# Altium PCB GoodProject_V1.0.PcbDoc (part 1 of 2)
Units mil, origin at the board's own origin, x right, y up, seen from the top; angles counter-clockwise.
Board outline 2680 x 2680 mil, 2 copper layers (Top Layer, Bottom Layer); 78 components, 77 nets, 313 pads, 117 vias.
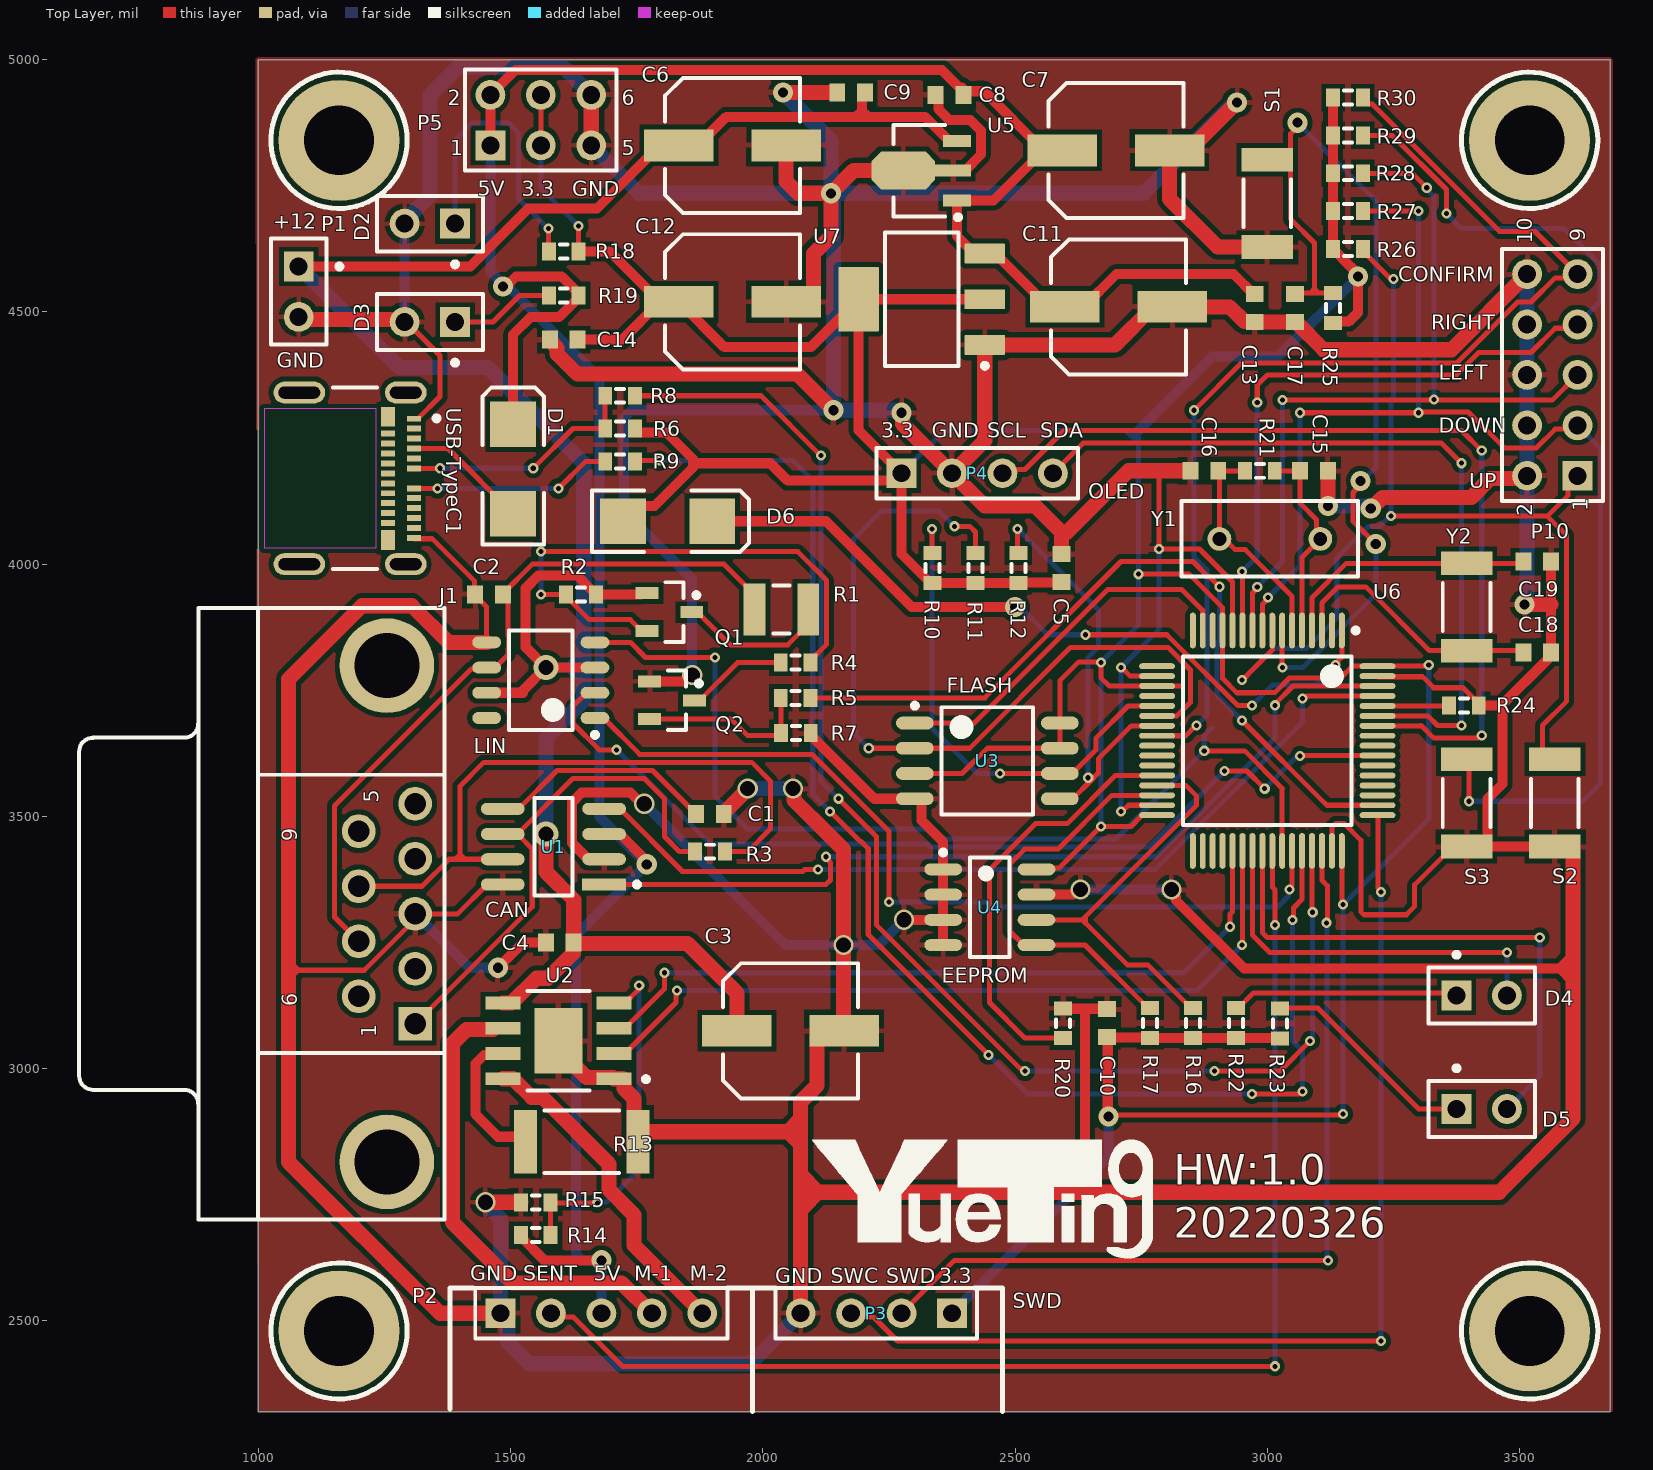
[diagram p0: Top Layer view]
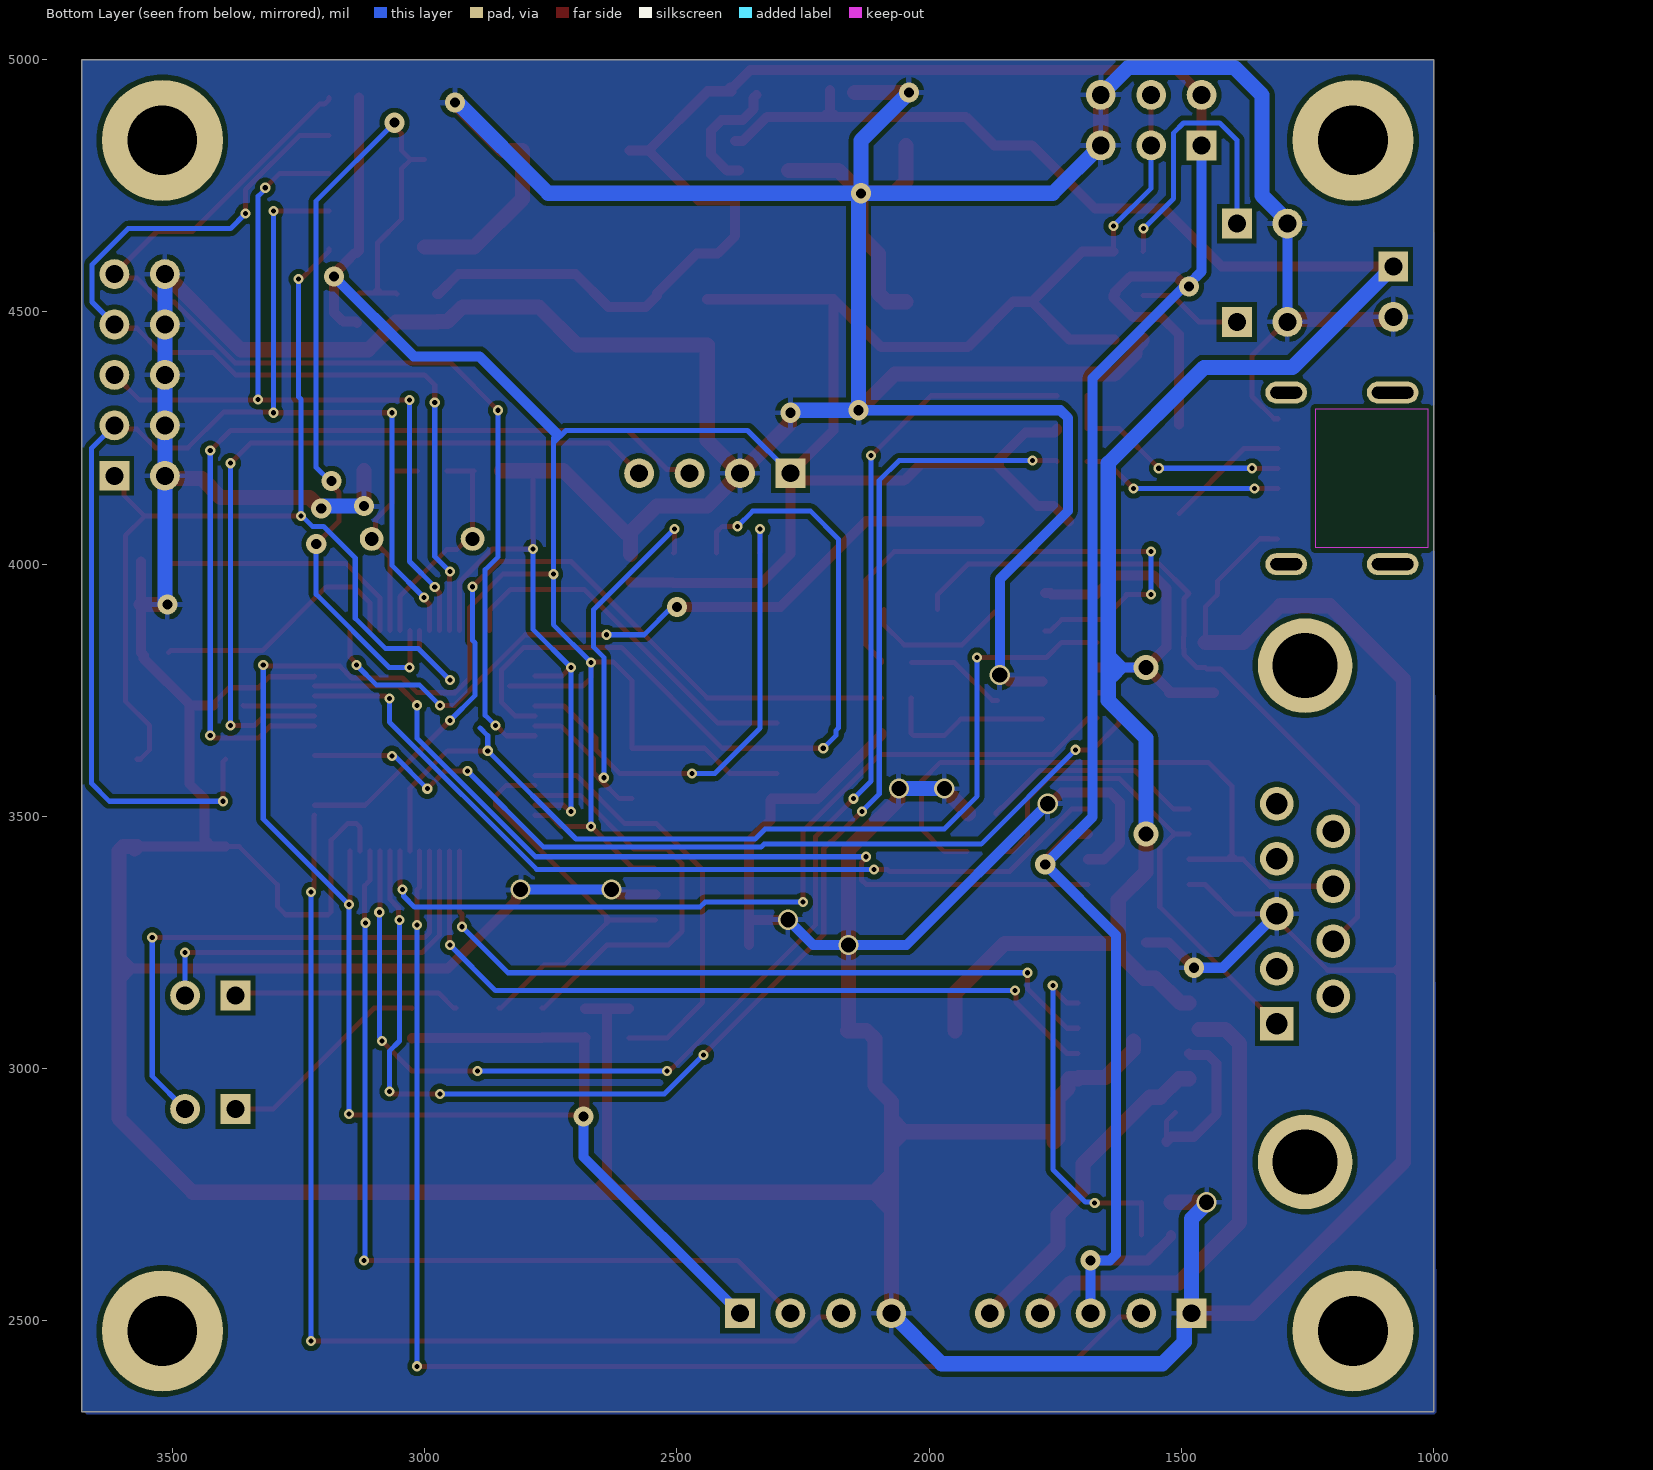
[diagram p1: Bottom Layer view, seen from below]

## Layer stack, top to bottom
Top Solder: solder mask 0.4, Solder Resist, Dk 3.5
Top Layer: signal copper 1.4
Dielectric 1: dielectric 12.6, FR-4, Dk 4.8
Bottom Layer: signal copper 1.4
Bottom Solder: solder mask 0.4, Solder Resist, Dk 3.5

## Board outline
1000,2320 3680,2320 3680,5000 1000,5000

## Design rules (kind name [scope] priority, off if disabled: settings)
Clearance [All] p1: gap=10 ignorepadtopadclearanceinfootprint=FALSE except(0: Arc-Hole Track-Hole SMDPad-Hole THPad-Hole Via-Hole Fill-Hole Poly-Hole Region-Hole Text-Hole; 6: Arc-Arc Arc-Track Track-Track)
PolygonConnect [All] p1: connectstyle=Relief reliefconductorwidth=10 reliefentries=4 polygonreliefangle="90 Angle" airgapwidth=10
RoutingVias [All] p1: holewidth=10 width=20 viastyle="Through Hole" minholewidth=10 minwidth=20 maxholewidth=30 maxwidth=50
SolderMaskExpansion [All] p1: expansion=4 istentingtop=FALSE
Width [All] p1: maxlimit=50 minlimit=10 preferedwidth=10
30 further rules are at their usual default settings.

## Components (designator, comment, footprint, x,y, rotation, side; value= is the part's Value field where it differs from the comment)
C1 "Cap" 1608[0603] 1895,3505 r0 top value=0.1uF
C2 "Cap" 1608[0603] 1457.44,3940 r0 top value=0.1uF
C3 "100uF" NIC-CAPA2-6.3X5.8_V 2055,3075 r0 top
C4 "Cap" 1608[0603] 1597.56,3250 r0 top value=0.22uF
C5 "Cap" 1608[0603] 2591.83,3992.13 r90 top value=0.1uF
C6 "100uF" NIC-CAPA2-6.3X5.8_V 1940,4830 r0 top
C7 "100uF" NIC-CAPA2-6.3X5.8_V 2700,4820 r0 top
C8 "Cap" 1608[0603] 2370,4930 r0 top value=22uF
C9 "Cap" 1608[0603] 2175,4935 r0 top value=22uF
C10 "Cap" 1608[0603] 2682.56,3090.32 r270 top value=22pF
C11 "22uF" NIC-CAPA2-6.3X5.8_V 2705,4510 r0 top
C12 "22uF" NIC-CAPA2-6.3X5.8_V 1940,4520 r0 top
C13 "Cap" 1608[0603] 2975,4507.56 r90 top value=0.1uF
C14 "Cap" 1608[0603] 1605.47,4445 r0 top value=0.1uF
C15 "Cap" 1608[0603] 3092.56,4185 r0 top value=22pF
C16 "Cap" 1608[0603] 2875.12,4185 r180 top value=22pF
C17 "Cap" 1608[0603] 3055,4507.56 r90 top value=0.1uF
C18 "Cap" 1608[0603] 3535,3825 r180 top value=22pF
C19 "Cap" 1608[0603] 3535,4005 r180 top value=22pF
D1 "Diode" SMB 1505,4188.58 r90 top
D2 "LED2" PIN2 1390,4675 r180 top
D3 "LED2" PIN2 1390,4480 r180 top
D4 "LED2" PIN2 3375,3145 r0 top
D5 "LED2" PIN2 3375,2920 r0 top
D6 "Diode 1N4148" SMB 1811.42,4085 r0 top
J1 "D Connector 9" DSUB1.385-2H9 880.98,3306.93 r90 top
LIN "TJA1020" SOP127P600X175-8N 1560,3770 r180 top (schematic designator *1)
P1 "Power" PIN2 1080,4590 r270 top
P2 "SENT" HDR1X5 1480,2515 r0 top
P3 "SWD" HDR1X4 2375,2515 r180 top
P4 "OLED" HDR1X4 2275,4180 r0 top
P5 "Header 3X2" HDR2X3 1460,4830 r0 top
P10 "Header 5X2" HDR2X5 3615,4175 r90 top
Q1 "MOSFET-N" SOT23_N 1815,3905 r0 top
Q2 "NPN" SOT23_N 1820,3730 r0 top
R1 "Res3" 14-1210 2036.85,3910 r0 top value=1K
R2 "Res3" J1-0603 1639.53,3940 r0 top value=190k
R3 "Res3" J1-0603 1895.47,3430 r0 top value=120
R4 "Res3" J1-0603 2065,3805 r0 top value=1K
R5 "Res3" J1-0603 2065,3735 r0 top value=10K
R6 "Res3" J1-0603 1717.13,4268.78 r0 top value=1.5K
R7 "Res3" J1-0603 2065.47,3665 r0 top value=100K
R8 "Res3" J1-0603 1717.13,4333.78 r0 top value=22
R9 "Res3" J1-0603 1717.13,4203.78 r0 top value=22
R10 "Res3" J1-0603 2336.22,3992.13 r270 top value=10K
R11 "Res3" J1-0603 2421.42,3992.13 r270 top value=10K
R12 "Res3" J1-0603 2506.63,3992.13 r270 top value=10K
R13 "0.25 1W" FP-CRCW2512-e3-IPC_C 1641.25,2855 r0 top
R14 "Res3" J1-0603 1550,2670 r0 top value=1K
R15 "Res3" J1-0603 1550,2735 r0 top value=1K
R16 "Res3" J1-0603 2852.97,3090.32 r270 top value=4.7K
R17 "Res3" J1-0603 2767.76,3090.32 r270 top value=4.7K
R18 "Res3" J1-0603 1605.47,4620 r180 top value=1K
R19 "Res3" J1-0603 1605.47,4532.5 r180 top value=1K
R20 "Res3" J1-0603 2595,3090 r90 top value=10K
R21 "Res3" J1-0603 2985.12,4185 r0 top value=10M
R22 "Res3" J1-0603 2938.17,3090.32 r90 top value=1K
R23 "Res3" J1-0603 3025,3089.53 r90 top value=1K
R24 "Res3" J1-0603 3389.53,3720 r0 top value=10K
R25 "Res3" J1-0603 3130,4507.56 r270 top value=10K
R26 "Res3" J1-0603 3159.82,4624.7 r0 top value=10K
R27 "Res3" J1-0603 3159.82,4699.7 r0 top value=10K
R28 "Res3" J1-0603 3159.82,4774.7 r0 top value=10K
R29 "Res3" J1-0603 3159.82,4849.7 r0 top value=10K
R30 "Res3" J1-0603 3159.82,4924.7 r0 top value=10K
S1 "SW-PB" 12Z-2010 3000,4715 r270 top
S2 "SW-PB" 12Z-2010 3570,3526.61 r270 top
S3 "SW-PB" 12Z-2010 3395,3526.61 r270 top
U1 "CAN" FP-SOT96-1-IPC_A 1585,3440 r180 top
U2 "A4950ELJTR-T" FP-LJ-8-MFG 1595,3055 r180 top
U3 "FLASH" WINB-SOIC-8_M 2445,3610 r0 top
U4 "EEPROM" SOIC-SN8_L 2450,3320 r0 top
U5 "L78L05ABUTR" SOT-89_N 2310,4780 r180 top
U6 "STM32F101RBT6" LQFP64_N 3000,3650 r270 top
U7 "REG1117-3.3" DCY0004A_M 2315,4525 r180 top
USB-TypeC1 "USB-TypeC" FP-1054500101-MFG 1160,4170 r270 top
Y1 "8M" RAD-0.2 3005,4050 r0 top
Y2 "32.768k" 12Z-2010 3395,3915 r90 top

## Footprints (in the part's own frame and the unit in brackets; to place one, negate y for a bottom-side part, rotate by r counter-clockwise, add the part's x,y. Pads: shape width x height; smd on the part's side, far side on the other; paste and mask are expansions set on the pad)
12Z-2010 [mm] "Chip Resistor, Body 5.0x2.5mm, IPC High Density"
  rect 1.2x2.6 smd: 1(-2.2,0) 2(2.2,0)
  silkscreen extent -1.2,-1.2 1.2,1.2, body extent -2.58,-1.33 2.58,1.33, height 0.9
14-1210 [mm] "Chip Resistor, Body 3.2x2.5mm, IPC High Density"
  rect 1.1x2.6 smd: 1(-1.35,0) 2(1.35,0)
  silkscreen extent -0.4,-1.2 0.4,1.2, body extent -1.68,-1.32 1.68,1.32, height 0.9
1608[0603] [mm] "Chip Capacitor, Body 1.6x0.8mm, IPC High Density"
  rect 0.8x0.9 smd: 1(-0.7,0) 2(0.7,0)
  body extent -0.87,-0.48 0.87,0.48, height 1.3
DCY0004A_M [mm] "SOT223, 4-Leads, Body 6.7x3.7mm, Pitch 2.3mm, IPC Low Density"
  rrect10% 2.05x1 smd: 1(-3.175,2.3) 2(-3.175,0) 3(-3.175,-2.3)
  rrect5% 2.05x3.25 smd: 4(3.175,0)
  silkscreen extent -3.3,-3.35 1.85,3.47, body extent -3.5,-3.25 3.5,3.25, height 1.62
DSUB1.385-2H9 [mm] "Connector; D Subminiature; 9 Position; Right Angle; Pitch 1.385 mm"
  rect 1.69x1.69 hole 1.09: 1(-5.54,-10.92)
  round 1.69 hole 1.09: 2(-2.77,-10.92) 3(0,-10.92) 4(2.77,-10.92) 5(5.54,-10.92) 6(-4.155,-8.08) 7(-1.385,-8.08) 8(1.385,-8.08) 9(4.155,-8.08)
  round 4.76 hole 3.26: 10(-12.495,-9.5) 11(12.495,-9.5)
  silkscreen extent -15.4,-12.4 15.4,6
FP-1054500101-MFG [mm]
  rrect100% 1.1x2.1 hole 1.6 slot 0.6 at 0 deg paste-1000 mask+0: 1(-4.32,3.36) 2(4.32,3.36)
  rrect100% 1.1x2.6 hole 2.1 slot 0.6 at 0 deg paste-1000 mask+0: 3(-4.32,-2) 4(4.32,-2)
  rect 0.3x0.7 smd paste+0 mask+0: A1(-3,3.77) A2(-2.5,3.77) A3(-2,3.77) A4(-1.5,3.77) A5(-1,3.77) A6(-0.5,3.77) A7(0.5,3.77) A8(1,3.77) A9(1.5,3.77) A10(2,3.77) A11(2.5,3.77) A12(3,3.77) B2(2.25,2.47) B3(1.75,2.47) B4(1.25,2.47) B5(0.75,2.47) B6(0.25,2.47) B7(-0.25,2.47) B8(-0.75,2.47) B9(-1.25,2.47) B10(-1.75,2.47) B11(-2.25,2.47)
  rect 1x0.7 smd paste+0 mask+0: B1(3.1,2.47) B12(-3.1,2.47)
  Keep-Out Layer region: -3.5,-3.77 3.5,-3.77 3.5,1.88 -3.5,1.88
  silkscreen extent -4.57,-0.3 4.57,5.04
FP-CRCW2512-e3-IPC_C [mil]
  rect 45.47x126.31 smd paste+0 mask+0: 1(-111.25,0) 2(111.25,0)
  silkscreen extent -74,-62 74,62, body extent -138,-69 138,69, height 10
FP-LJ-8-MFG [mm]
  rect 1.75x0.65 smd paste+0 mask+0: 1(-2.8,1.905) 2(-2.8,0.635) 3(-2.8,-0.635) 4(-2.8,-1.905) 5(2.8,-1.905) 6(2.8,-0.635) 7(2.8,0.635) 8(2.8,1.905)
  rect 2.41x3.3 smd paste+0 mask+0: 9(0,0)
  silkscreen extent -4.52,-2.5 1.55,2.5, body extent -3.77,-2.6 3.77,2.6, height 0.25
FP-SOT96-1-IPC_A [mil]
  rect 86.79x23.94 smd paste+0 mask+0: 1(-100.43,75)
  rrect100% 86.79x23.94 smd paste+0 mask+0: 2(-100.43,25) 3(-100.43,-25) 4(-100.43,-75) 5(100.43,-75) 6(100.43,-25) 7(100.43,25) 8(100.43,75)
  silkscreen extent -170,-96 37,96, body extent -164,-116 164,116, height 10
HDR1X4 [mm] "Connector; Header; 4 Position"
  rect 1.5x1.5 hole 0.9: 1(0,0)
  round 1.5 hole 0.9: 2(2.54,0) 3(5.08,0) 4(7.62,0)
  silkscreen extent -1.27,-1.27 8.89,1.27
HDR1X5 [mm] "Connector; Header; 5 Position"
  rect 1.5x1.5 hole 0.9: 1(0,0)
  round 1.5 hole 0.9: 2(2.54,0) 3(5.08,0) 4(7.62,0) 5(10.16,0)
  silkscreen extent -1.27,-1.27 11.43,1.27
HDR2X3 [mm] "Connector; Header; 3x2 Position"
  rect 1.5x1.5 hole 0.9: 1(0,0)
  round 1.5 hole 0.9: 2(0,2.54) 3(2.54,0) 4(2.54,2.54) 5(5.08,0) 6(5.08,2.54)
  silkscreen extent -1.27,-1.27 6.35,3.81
HDR2X5 [mm] "Connector; Header; 5x2 Position"
  rect 1.5x1.5 hole 0.9: 1(0,0)
  round 1.5 hole 0.9: 2(0,2.54) 3(2.54,0) 4(2.54,2.54) 5(5.08,0) 6(5.08,2.54) 7(7.62,0) 8(7.62,2.54) 9(10.16,0) 10(10.16,2.54)
  silkscreen extent -1.27,-1.27 11.43,3.81
J1-0603 [mm] "Chip Resistor, Body 1.6x0.8mm, IPC High Density"
  rect 0.7x0.9 smd: 1(-0.75,0) 2(0.75,0)
  silkscreen extent -0.2,-0.35 0.2,0.35, body extent -0.85,-0.48 0.85,0.48, height 0.9
LQFP64_N [mm] "Thin QFP, 64-Leads, Body 10x10mm, Pitch 0.5mm, IPC Medium Density"
  oval 1.8x0.3 smd: 1(-5.55,3.75) 2(-5.55,3.25) 3(-5.55,2.75) 4(-5.55,2.25) 5(-5.55,1.75) 6(-5.55,1.25) 7(-5.55,0.75) 8(-5.55,0.25) 9(-5.55,-0.25) 10(-5.55,-0.75) 11(-5.55,-1.25) 12(-5.55,-1.75) 13(-5.55,-2.25) 14(-5.55,-2.75) 15(-5.55,-3.25) 16(-5.55,-3.75) 33(5.55,-3.75) 34(5.55,-3.25) 35(5.55,-2.75) 36(5.55,-2.25) 37(5.55,-1.75) 38(5.55,-1.25) 39(5.55,-0.75) 40(5.55,-0.25) 41(5.55,0.25) 42(5.55,0.75) 43(5.55,1.25) 44(5.55,1.75) 45(5.55,2.25) 46(5.55,2.75) 47(5.55,3.25) 48(5.55,3.75)
  oval 0.3x1.8 smd: 17(-3.75,-5.55) 18(-3.25,-5.55) 19(-2.75,-5.55) 20(-2.25,-5.55) 21(-1.75,-5.55) 22(-1.25,-5.55) 23(-0.75,-5.55) 24(-0.25,-5.55) 25(0.25,-5.55) 26(0.75,-5.55) 27(1.25,-5.55) 28(1.75,-5.55) 29(2.25,-5.55) 30(2.75,-5.55) 31(3.25,-5.55) 32(3.75,-5.55) 49(3.75,5.55) 50(3.25,5.55) 51(2.75,5.55) 52(2.25,5.55) 53(1.75,5.55) 54(1.25,5.55) 55(0.75,5.55) 56(0.25,5.55) 57(-0.25,5.55) 58(-0.75,5.55) 59(-1.25,5.55) 60(-1.75,5.55) 61(-2.25,5.55) 62(-2.75,5.55) 63(-3.25,5.55) 64(-3.75,5.55)
  silkscreen extent -5.67,-4.25 4.25,4.58, body extent -5,-5 5,5, height 1.6
NIC-CAPA2-6.3X5.8_V [mm] "Aluminum Electrolytic Capacitor, Diameter 6.3mm, Height 6.1mm, Pitch 5.4mm"
  rect 3.5x1.6 smd: 1(-2.7,0) 2(2.7,0)
  silkscreen extent -3.4,-3.4 3.4,3.4, body extent -3.14,-3.12 3.14,3.15, height 6.1
PIN2 [mm] "Photosensitive Diode; 2 Leads"
  rect 1.5x1.5 hole 0.9: 1(0,0)
  round 1.5 hole 0.9: 2(2.54,0)
  silkscreen extent -1.4,-1.4 3.94,2.17
RAD-0.2 [mm] "Radial Cap, Thru-Hole; 2 Leads; 0.2 in Pin Spacing"
  round 1.2 hole 0.7: 1(-2.54,0) 2(2.54,0)
  silkscreen extent -4.44,-1.91 4.44,1.91
SMB [mm] "DO-214-AA/SMB; 2 C-Bend Leads; Body 5.3 x 3.6 mm, inc. leads (LxW)"
  rect 2.3x2.3 smd: 1(-2.25,0) 2(2.25,0)
  silkscreen extent -3.8,-1.55 4.1,1.55
SOIC-SN8_L [mm] "SOIC, 8-Leads, Body 4.9x3.9mm, Pitch 1.27mm, IPC High Density"
  oval 1.9x0.6 smd: 1(-2.35,1.905) 2(-2.35,0.635) 3(-2.35,-0.635) 4(-2.35,-1.905) 5(2.35,-1.905) 6(2.35,-0.635) 7(2.35,0.635) 8(2.35,1.905)
  silkscreen extent -2.47,-2.5 1,2.88, body extent -2,-2.5 2,2.5, height 1.75
SOP127P600X175-8N [mm] "SOP, 8-Leads, Body 4.90x3.90mm, Pitch 1.27mm, IPC Medium Density"
  oval 1.45x0.6 smd: 1(-2.725,1.905) 2(-2.725,0.635) 3(-2.725,-0.635) 4(-2.725,-1.905) 5(2.725,-1.905) 6(2.725,-0.635) 7(2.725,0.635) 8(2.725,1.905)
  silkscreen extent -2.85,-2.5 1.6,2.88, body extent -2,-2.5 2,2.5, height 1.75
SOT23_N [mm] "SOT23, 3-Leads, Body 2.9x1.3mm, Pitch 0.95mm, Lead Span 2.3mm - Reverse Pinning, IPC Medium Density"
  rect 1.15x0.6 smd: 1(1.125,0) 2(-1.125,-0.95) 3(-1.125,0.95)
  silkscreen extent -0.2,-1.5 1.48,1.5, body extent -0.7,-1.5 0.7,1.5, height 1.1
SOT-89_N [mm] "SOT89, 3-Leads, Body 4.5x2.4 mm, Pitch 1.5mm, Lead Span 4.1mm, IPC Medium Density"
  rect 1.4x0.6 smd: 1(-1.9,1.5) 3(-1.9,-1.5)
  rect 1.8x0.6 smd: 2(-1.7,0)
  oct 3.2x1.9 smd: 2(0.8,0)
  silkscreen extent -2.08,-2.3 1.3,2.47, body extent -1.3,-2.3 1.3,2.3, height 1.6
WINB-SOIC-8_M [mm] "SOIC, 8-Leads, Body 5.4x5.4mm, Pitch 1.27mm, IPC Low Density"
  oval 1.9x0.65 smd: 1(-3.65,1.905) 2(-3.65,0.635) 3(-3.65,-0.635) 4(-3.65,-1.905) 5(3.65,-1.905) 6(3.65,-0.635) 7(3.65,0.635) 8(3.65,1.905)
  silkscreen extent -3.77,-2.7 2.3,2.9, body extent -2.7,-2.7 2.7,2.7, height 2.16

## Part data
C1 C2 C4 C5 C8 C9 C10 C13 C14 C15 C16 C17 C18 C19: "Capacitor", LatestRevisionDate=17-Jul-2002, LatestRevisionNote="Re-released for DXP Platform.", PackageDescription="Radial Cap, Thru-Hole; 2 Leads; 0.3 in Pin Spacing", PackageReference=RAD-0.3, Published=8-Jun-2000, Publisher="Altium Limited"
C3 C6 C7: library part CMP-0687-00035-1, "Aluminum Electrolytic Capacitor, UD Series, Low Impedance, 68 uF, 16 V, + / - 20%, -55 to 105 degC, Chip Type, 6.3 x 5.8 mm D x L, Pb-Free, Reel", Manufacturer=Nichicon, PartNumber=UUD1C680MCL1GS, Rated Capacitance="68 uF", Rated Ripple Current (at 100kHz)="230 mA", Rated Voltage="50 V", Tolerance Rated Capacitance="-20 to 20%", ComponentLink1Description="Manufacturer URL", ComponentLink1URL=http://www.nichicon.co.jp/, ComponentLink2Description=Datasheet, ComponentLink2URL=http://products.nichicon.co.jp/en/pdf/XJA043/e-ud.pdf, ComponentLink3Description="Package Specification", ComponentLink3URL=http://products.nichicon.co.jp/en/pdf/XJA043/e-ud.pdf, DatasheetVersion=08/2012, Diameter="6.3 mm", Endurance Time="2000 h", Impedance="0.44 Ohm", Length="5.8 mm", Mounting Technology="Surface Mount", PackageDescription="2-Pin Surface Mount Device, Diameter 6.3 mm, Height 5.8 mm, Pitch 5.4 mm", PackageReference=CAPAE-D6.3H5.8, Packing="Dia382mm Reel", RoHS=TRUE
C11: library part CMP-0687-00035-1, "Aluminum Electrolytic Capacitor, UD Series, Low Impedance, 68 uF, 16 V, + / - 20%, -55 to 105 degC, Chip Type, 6.3 x 5.8 mm D x L, Pb-Free, Reel", Manufacturer=Nichicon, PartNumber=UUD1C680MCL1GS, Rated Capacitance="68 uF", Rated Ripple Current (at 100kHz)="230 mA", Rated Voltage="10 V", Tolerance Rated Capacitance="-20 to 20%", ComponentLink1Description="Manufacturer URL", ComponentLink1URL=http://www.nichicon.co.jp/, ComponentLink2Description=Datasheet, ComponentLink2URL=http://products.nichicon.co.jp/en/pdf/XJA043/e-ud.pdf, ComponentLink3Description="Package Specification", ComponentLink3URL=http://products.nichicon.co.jp/en/pdf/XJA043/e-ud.pdf, DatasheetVersion=08/2012, Diameter="6.3 mm", Endurance Time="2000 h", Impedance="0.44 Ohm", Length="5.8 mm", Mounting Technology="Surface Mount", PackageDescription="2-Pin Surface Mount Device, Diameter 6.3 mm, Height 5.8 mm, Pitch 5.4 mm", PackageReference=CAPAE-D6.3H5.8, Packing="Dia382mm Reel", RoHS=TRUE
C12: library part CMP-0687-00035-1, "Aluminum Electrolytic Capacitor, UD Series, Low Impedance, 68 uF, 16 V, + / - 20%, -55 to 105 degC, Chip Type, 6.3 x 5.8 mm D x L, Pb-Free, Reel", Manufacturer=Nichicon, PartNumber=UUD1C680MCL1GS, Rated Capacitance="68 uF", Rated Ripple Current (at 100kHz)="230 mA", Rated Voltage=10V, Tolerance Rated Capacitance="-20 to 20%", ComponentLink1Description="Manufacturer URL", ComponentLink1URL=http://www.nichicon.co.jp/, ComponentLink2Description=Datasheet, ComponentLink2URL=http://products.nichicon.co.jp/en/pdf/XJA043/e-ud.pdf, ComponentLink3Description="Package Specification", ComponentLink3URL=http://products.nichicon.co.jp/en/pdf/XJA043/e-ud.pdf, DatasheetVersion=08/2012, Diameter="6.3 mm", Endurance Time="2000 h", Impedance="0.44 Ohm", Length="5.8 mm", Mounting Technology="Surface Mount", PackageDescription="2-Pin Surface Mount Device, Diameter 6.3 mm, Height 5.8 mm, Pitch 5.4 mm", PackageReference=CAPAE-D6.3H5.8, Packing="Dia382mm Reel", RoHS=TRUE
D1: "Default Diode", Code_JEDEC=DO-214-AB, LatestRevisionDate=17-Jul-2002, LatestRevisionNote="Re-released for DXP Platform.", PackageDescription="DO-214-AB/SMC; 2 C-Bend Leads; Body 7.9 x 5.9 mm, inc. leads (LxW)", PackageReference=SMC, PackageVersion=Sep-1996, Published=8-Jun-2000, Publisher="Altium Limited"
D2 D3 D4 D5: "Typical RED, GREEN, YELLOW, AMBER GaAs LED", LatestRevisionDate=17-Jul-2002, LatestRevisionNote="Re-released for DXP Platform.", PackageDescription="SM LED; 2 Flat Leads", PackageReference=3.2X1.6X1.1, PackageVersion=Feb-2002, Published=8-Jun-2000, Publisher="Altium Limited"
D6: "High Conductance Fast Diode", Code_JEDEC=DO-204-AH, ComponentLink1Description="Manufacturer Link", ComponentLink1URL=http://www.fairchildsemi.com/, ComponentLink2Description=Datasheet, ComponentLink2URL=http://www.fairchildsemi.com/ds/1N%2F1N4148.pdf, DatasheetVersion=1997, LatestRevisionDate=17-Jul-2002, LatestRevisionNote="Re-released for DXP Platform.", PackageDescription="Diode, Axial; Body 3.8 x 1.9 mm (LxDia. max), Lead Dia. 0.53 mm (max)", PackageReference=DO-35, Published=8-Jun-2000, Publisher="Altium Limited"
J1: "Receptacle Assembly, 9 Position, Right Angle", PackageDocument=O, DatasheetDocument=1-Sep-1999, Gender=Receptacle, LatestRevisionDate=17-Jul-2002, LatestRevisionNote="Re-released for DXP Platform.", Orientation="Right Angle", PackageReference=788750, Positions=9, Published=15-Jun-2001, Publisher="Altium Limited"
P1: library part "Header 2H", "Header, 2-Pin, Right Angle", LatestRevisionDate=17-Jul-2002, LatestRevisionNote="Re-released for DXP Platform.", Publisher="Altium Limited"
P2: library part "Header 5", "Header, 5-Pin", LatestRevisionDate=17-Jul-2002, LatestRevisionNote="Re-released for DXP Platform.", Publisher="Altium Limited"
P3 P4: library part "Header 4", "Header, 4-Pin", LatestRevisionDate=17-Jul-2002, LatestRevisionNote="Re-released for DXP Platform.", Publisher="Altium Limited"
P5: "Header, 3-Pin, Dual row", LatestRevisionDate=17-Jul-2002, LatestRevisionNote="Re-released for DXP Platform.", Publisher="Altium Limited"
P10: "Header, 5-Pin, Dual row", LatestRevisionDate=17-Jul-2002, LatestRevisionNote="Re-released for DXP Platform.", Publisher="Altium Limited"
Q1: "N-Channel MOSFET", LatestRevisionDate=17-Jul-2002, LatestRevisionNote="Re-released for DXP Platform.", PackageDescription="TO, Flat Index; 3 In-Line, Axial Leads; Body Dia. 4.6mm; Lead Dia. 0.5 mm (max)", PackageReference=E3, PackageVersion=1995/1996, Published=8-Jun-2000, Publisher="Altium Limited"
Q2: "NPN Bipolar Transistor", Code_JEDEC=TO-226-AA, LatestRevisionDate=17-Jul-2002, LatestRevisionNote="Re-released for DXP Platform.", PackageDescription="TO, Flat Index; 3 In-Line, Axial Leads; Body Dia. 4.8mm; Leads 0.55 x 0.51 mm (max)", PackageReference=TO-226-AA, Published=8-Jun-2000, Publisher="Altium Limited"
R1 R2 R3 R4 R5 R6 R7 R8 R9 R10 R11 R12 R14 R15 R16 R17 R18 R19 R20 R21 R22 R23 R24 R25 R26 R27 R28 R29 R30: "Resistor", LatestRevisionDate=29-May-2009, LatestRevisionNote="IPC-7351 Footprint Added.", PackageDescription="Chip Resistor", PackageReference=J1-0603, Published=8-Jun-2000, Publisher="Altium Limited"
R13: library part CMP-02407-006956-1, "RES Thick Film, 1Ω, 1%, 1W, 100ppm/°C, 2512", Case Code (Imperial)=2512, Case Code (Metric)=6432, Max Operating Temperature=155°C, Max Power Dissipation=1W, Min Operating Temperature=-55°C, Package Quantity=2000, Resistance=1R, Temperature Coefficient=100ppm/°C, Tolerance=1%, Voltage Rating=500V, Case/Package=2512, Composition="Thick Film", Contact Plating=Tin, Depth=3.15mm, Features="Automotive AEC-Q200", Height=0.6mm, Lead Free="Lead Free", Length=6.3mm, Military Standard=Not, Mount="Surface Mount", Number of Pins=2, Number of Terminations=2, packaging="Tape and Reel", Power Rating=1W, Radiation Hardening=No, REACH SVHC="No SVHC", Termination=SMD/SMT, Voltage Rating (DC)=500V, Weight=0.001429oz, Width=0.124inch
S1 S2 S3: "Switch", LatestRevisionDate=17-Jul-2002, LatestRevisionNote="Re-released for DXP Platform.", PackageDescription="Switch; 2 Leads", PackageReference=SPST-2, Published=24-Mar-1999, Publisher="Altium Limited"
U1: library part CMP-2000-04923-2, "IC TRANSCEIVER HALF 1/1 8SO", Case/Package=SO, Max Operating Temperature=150°C, Max Supply Current=10mA, Max Supply Voltage=5.25V, Min Operating Temperature=-40°C, Min Supply Voltage=4.75V, Package Quantity=2500, Contact Plating=Gold, Data Rate=1Mbps, Interface=CAN, Lead Free="Lead Free", Mount="Surface Mount", Nominal Supply Current=10mA, Number of Pins=8, Number of Receive Buffers=1, Number of Transceivers=1, Number of Transmit Buffers=1, packaging="Tape and Reel", Radiation Hardening=No, REACH SVHC="No SVHC", Receiver Hysteresis=70mV, Simplex/Duplex="Half Duplex"
U2: library part CMP-82903-000003-1, "IC MOTOR DRIVER 8V-40V 8SOIC", Case/Package=SOIC, Collector Emitter Voltage (VCEO)=40V, Max Collector Current=3.5A, Max Operating Temperature=85°C, Min Operating Temperature=-40°C, Min Supply Voltage=8V, Package Quantity=1, Height=1.55mm, Lead Free="Lead Free", Length=4.9mm, Max Supply Voltage=40V, Motor Type=Brushed, Mount="Surface Mount", Number of Outputs=1, Number of Pins=8, Output Current=3.5A, Output Voltage=40V, packaging="Tape and Reel", Radiation Hardening=No, REACH SVHC="No SVHC", Width=3.9mm
U3: library part CMP-2000-05005-1, "3V 128M-Bit Serial Flash Memory with Dual/Quad SPI & QPI, 2.7 to 3.6 V, -40 to 85 degC, 8-Pin SOIC, RoHS, Tape and Reel", Manufacturer=Winbond, Operating Supply Voltage (Max)=3.6V, Operating Supply Voltage (Min)=2.7V, Operating Supply Voltage (Typ)=3/3.3V, Operating Temp Range=-40Cto85C, Operating Temperature (Max)=85C, Operating Temperature (Min)=-40C, Operating Temperature Classification=Industrial, Package Description="8-Pin Small Outline Integrated Circuit, Body 5.28 x 5.28 mm, Pitch 1.27 mm", Package Reference=SS-8, Package Type=SOICW, Program/Erase Volt (Typ)=2.7to3.6V, Supply Current=20mA, Access Time (Max)=7ns, Address Bus=24b, Boot Type=NotRequired, Cell Type=NOR, Datasheet URL=http://download.siliconexpert.com/pdfs/2015/11/30/6/42/17/890/win_/manual/3w25q128fv20rev.l2008242015.pdf, Datasheet Version="Rev. L, 08/2015", Density=134217728Bit, Interface Type=Serial(SPI), Manufacturer URL=http://www.winbond.com/hq/index.html?__locale=en, Mounting=SurfaceMount, Number of Words=16777216, Pin Count=8, Programmable=Yes, Rad Hardened=No, Sync/Async=Synchronous, Word Size=8b
U4: library part CMP-0159-00277-1, "2Kbit, 400kHz, 5V, I2C Serial EEPROM, 8-Pin SOIC 150mil, Industrial Temperature", Code_IPC=SOIC127P600-8, Code_JEDEC=MS-012, DatasheetVersion="revJ, Aug-2008", PackageDescription="8-Lead Plastic Small Outline (SN) - Narrow, 3.90mm Body [SOIC]", PackageReference=SOIC-SN8, PackageVersion="revBB, Aug-2009"
U5: library part CMP-0244-00406-1, "Positive Voltage Regulator, 5V, 4-Pin SOT-89, Tape and Reel", ComponentLink1Description="Manufacturer URL", ComponentLink1URL=http://www.st.com, ComponentLink2Description=Datasheet, ComponentLink2URL=http://www.st.com/internet/com/TECHNICAL_RESOURCES/TECHNICAL_LITERATURE/DATASHEET/CD00000446.pdf, DatasheetVersion=1/02/2011, PackageDescription="3-Pin SOT-89 Package 1.5 mm Pitch, 4.1 mm Lead Span", PackageReference=SOT-89, PackageVersion=2011
U6: "STM32 ARM-based 32-bit MCU with 128 Kbytes Flash, 64-pin LQFP, Industrial Temperature", ComponentLink1Description="Manufacturer Link", ComponentLink1URL=www.st.com/stm32, ComponentLink2Description=Datasheet, ComponentLink2URL=http://www.st.com/stonline/products/literature/ds/13586.pdf, DatasheetVersion="rev6, Mar-2008", PackageDescription="64-Pin Low-Profile Quad Flat Pack, 10 x 10 mm Body, 0.5 mm Pitch (LQFP64)", PackageReference=LQFP64, PackageVersion=Mar-2008, Published=30-May-2008, Publisher="Altium Limited"
U7: library part CMP-0395-00549-2, "Single Output LDO, 800 mA, Fixed 3.3 V Output, 3.8 to 15 V Input, with Internal Current Limiting, 4-pin SOT-223 (DCY), -40 to 125 degC, Green (RoHS & no Sb/Br)", Manufacturer="Texas Instruments", Rating=Catalog, Code_JEDEC=TO-261, ComponentLink1Description="Manufacturer URL", ComponentLink1URL=http://www.ti.com/, ComponentLink2Description=Datasheet, ComponentLink2URL=http://www.ti.com/general/docs/lit/getliterature.tsp?genericPartNumber=REG1117-33&fileType=pdf, ComponentLink3Description="Package Specification", ComponentLink3URL=http://www.ti.com/litv/pdf/mpds094a, DatasheetVersion=SBVS001D, Eco-Plan="Green (RoHS & no Sb/Br)", Fixed Output Options(V)=5, Iout(Max)(A)=0.8, Iq(Typ)(mA)=4, Mounting Technology="Surface Mount", PackageDescription="4-Pin Plastic Small Outline, Body 3.5 x 6.5 mm, Pitch 2.3 mm", PackageReference=DCY0004A, PackageVersion=4202506/B, PartNumber=REG1117-3.3, SubFamily="Single Channel LDO", Vdo(Typ)(mV)=1100, Vin(Max)(V)=15, Vin(Min)(V)=3.8, Vout Adj(Max)(V)=3.3, Vout Adj(Min)(V)=3.3
USB-TypeC1: library part CMP-04767-000004-1, "CONN RCP USB3.1 TYPEC 24P SMD RA", Current Rating=0.25/1.25/5A, Manufacturer=Molex, Manufacturer Part Number=1054500101, Package=0, Temperature="-30°C to +85°C", Temperature Range High=+85°C, Temperature Range Low=-30°C, Voltage Rating=30V, Automotive=No, Category=Conn, ComponentLink2Description=Datasheet, ComponentLink2URL=https://www.molex.com/webdocs/datasheets/pdf/en-us/1054500101_IO_CONNECTORS.pdf, Conn Orientation="Right Angle", Contact Material=Gold,Nickel, Device Class L1=Connectors, Device Class L2="USB Connectors", Device Class L3=unset, Digikey Description="CONN RCP USB3.1 TYPEC 24P SMD RA", Footprint Url=https://www.molex.com/pdm_docs/sd/1054500101_sd.pdf, Height=3.44mm, Is Female=yes, Lead Free=Yes, Mouser Description="USB Shielded I/O Receptacle; Type C; Right Angle; Surface Mount; Gold over Nickel", Number Of Contacts=24, Octopart=https://octopart.com/105450-0101-molex-68082325, Pitch=0.5mm, RoHS=TRUE, Shielding=true, Usb Standard="USB 3.1"
Y1 Y2: library part XTAL, "Crystal Oscillator", LatestRevisionDate=17-Jul-2002, LatestRevisionNote="Re-released for DXP Platform.", PackageDescription="Crystal, Thru-Hole; 2 Leads; Body 3.1 x 8.2 mm (Dia.xH)", PackageReference=R38, Published=8-Jun-2000, Publisher="Altium Limited"

## Free pads (board coordinates)
  round 240 hole 138: 5(1160,2480) 5(1160,4840) 5(3520,2480) 5(3520,4840)

## Via types
v1: diameter 20, hole 10, Top Layer to Bottom Layer, tented both sides, 88 vias
v2: diameter 40, hole 20, Top Layer to Bottom Layer, tented both sides, 18 vias
v3: diameter 40, hole 30, Top Layer to Bottom Layer, tented both sides, 9 vias
v4: diameter 50, hole 30, Top Layer to Bottom Layer, tented both sides, 2 vias

## Nets (pads, with @x,y where several pads share a name; then routed paths per layer and width w, separated by ;. In a path a pad name is that pad's centre, name@x,y a point inside that pad or via, vN(x,y) a via of type N, cw(c..) or ccw(c..) an arc to the next point about the centre after c; other vN are vias at no path point)
3.3: C5.1 C10.2 C12.1 C14.2 D6.1 P3.1 P4.1 P5.3 P5.4 R6.2 R10.2 R11.2 R12.2 R16.2 R17.2 R18.1 R22.1 R23.1 R25.2 R26.1 R27.1 R28.1 R29.1 R30.1 U3.3 U3.7 U3.8 U4.8 U6.13 U6.19 U6.32 U6.48 U6.64 U7.2 U7.4 | length 9867.8
  Top Layer w10: P5.3 P5.4 ; R18.1 v1(1635,4670) ; R6.2 R6.2@1746.65,4272.72 ; U3.3 2395,3585 2445,3635 U3.7 U3.8 2588.7,3768.7 2626.42,3806.42 v1@2668.58,3806.42 ; U4.8 2545.13,3397.61 2587.61,3397.61 v1(2670,3480) 2729.61,3480 2751.38,3501.77 2780.9,3501.77 U6.32 ; v1(2670,3805) 2670,3775 2686.73,3758.27 U6.19 2831.93,3758.27 ; v2(2685,2905) 2688.09,2908.09 3148.09,2908.09 v1(3150,2910) ; v1(2745,3980) 2845,3980 2911.42,3913.58 2911.42,3829.1 2911.42,3773.23 2939.64,3745 2977.24,3745 2977.41,3745.18 3015.01,3745.18 3044.1,3774.27 3145,3774.27 3168.37,3797.64 U6.64 3218.85,3797.98 3315.28,3797.98 3317.29,3800 v1(3320,3800) ; R25.2 R25.2@3133.94,4478.03 ; U6.48 3147.98,3431.15 3147.98,3329.72 3150,3327.71 v1(3150,3325)
  Top Layer w20: C14.2 1721.3,4445 C12.1@1796.3,4520 ; R18.1 1696.3,4620 C12.1@1796.3,4520 ; D6.1 1753.24,4115.41 1785.41,4115.41 1861.72,4191.72 1861.72,4208.28 1808.94,4261.06 1750.43,4261.06 1746.65,4264.84 R6.2@1746.65,4268.35 ; 1861.72,4200 2015,4200 2049.53,4165.47 2260.47,4165.47 P4.1 ; U7.2 U7.4 ; C5.1@2592.13,3964.86 C5.1 2590.85,3963.58 2507.61,3963.58 R12.2 R11.2 R10.2 2332.28,3962.6 2275,4019.88 P4.1 ; C10.2@2681.18,3061.38 C10.2 C10.2@2683.54,3061.77 ; v2(2685,2905) 2683.78,2906.22 2683.78,3061.54 C10.2@2683.54,3061.77 ; R23.1 3024.61,3060.39 2938.56,3060.39 R22.1 R16.2 R17.2 2766.78,3061.77 C10.2@2683.54,3061.77 ; R30.1 R29.1 R28.1 R27.1 R26.1 3130.3,4620.77 3134.07,4616.99 3138.01,4616.99 3155.57,4599.43 3155.57,4598.7 v2@3173.03,4581.24 ; R25.2@3133.94,4478.03 3136.54,4480.64 3161.32,4480.64 3180,4499.32 v2(3180,4570) ; C12.1@1796.3,4520 C12.1 1923.7,4430 2095,4430 U7.4 ; U7.4 2190,4265 P4.1
  Bottom Layer w10: P5.3 1560,4745 v1(1635,4670) ; P4.1 2360,4265 2720,4265 2745,4240 ; v1(2670,3480) v1(2670,3805) ; v1@2671.91,3803.09 v1(2670,3805) ; 2737.5,4257.5 2745,4250 2745,4240 ; v1(3150,2910) v1(3150,3325) 3320,3495 v1(3320,3800) ; v1(2670,3805) 2745,3880 v1(2745,3980) 2745,4240
  Bottom Layer w20: P3.1 2685,2825 v2(2685,2905) ; 2737.5,4257.5 2891.84,4411.84 3021.84,4411.84 v2(3180,4570)
+5: C7.1 C8.2 C11.1 C13.2 D1.2 P2.3 P5.1 P5.2 R14.1 R19.1 U1.3 U5.1 U7.3 | length 5675.1
  Top Layer w20: P5.1 P5.2 1509.53,4979.53 2354.66,4979.53 2391.81,4942.38 2391.81,4937.72 2392.24,4937.28 C8.2@2400.87,4937.28 ; v2(1485,4550) 1490.41,4550 1510.63,4570.22 1601.22,4570.22 1631.22,4540.22 1631.22,4536.28 R19.1 1635,4528.56 1596.33,4489.89 1539.89,4489.89 1505,4455 D1.2 ; R14.1 1520.47,2666.06 1566.54,2620 v2(1680,2620) ; U1.3 1716.85,3465 1766.17,3415.68 1766.17,3408.83 v2(1770,3405) ; C8.2@2395.12,4945 2395.12,4943.03 C8.2@2400.87,4937.28 ; C7.1 C7.1@2556.3,4820 ; C13.2 2973.03,4535.12 2933.15,4575 2701.1,4575 2636.1,4510 C11.1 2561.3,4510 2539.8,4531.5 2539.8,4536.42 2460.67,4615.55 U7.3 2419.33,4615.55 2384.8,4650.08 U5.1 2457.24,4720.94 C7.1@2556.3,4820 ; C8.2@2400.87,4937.28 2439.02,4937.28 C7.1@2556.3,4820
  Bottom Layer w20: P5.1 1460,4580.41 1485,4555.41 v2(1485,4550) ; v2@1485,4560 1676,4369 1676,3499 v2(1770,3405) 1630,3265 1630,2631.72 1641.72,2620 v2(1680,2620) ; P2.3 v2@1680,2615
CAN-H: J1.8 R3.2 U1.7 | length 1334.4
  Top Layer w10: J1.8 1324.64,3361.46 1378.18,3415 1390,3415 ; U1.7 1410,3415 ; R3.2 1970,3430 2015,3475 2015,3570 1978,3607 1447,3607 1400,3560 1400,3425 ; 1390,3415 1400,3415 ; 1390,3415 1400,3425 ; 1400,3415 1400,3425 ; 1400,3415 1410,3415 ; 1400,3425 1410,3415
CAN-L: J1.1 R3.1 U1.6 | length 1015.9
  Top Layer w10: J1.1 1542.97,3320.88 1542.97,3435.47 1516,3462.43 U1.6@1516,3465 ; U1.6 U1.6@1516,3465 ; R3.1 1835,3430 1805,3460 1805,3535 1765,3575 1623.43,3575 1516,3467.57 U1.6@1516,3465
CAN-RX: U1.4 U6.61 | length 1756.2
  Top Layer w10: U1.4 1716.85,3515 1840,3391.85 1840,3390.86 2079,3390.86 2082.53,3394.38 v1(2109,3394.38) ; v1(3070,3733.27) 3072.71,3733.27 3078.02,3738.58 U6.61
  Bottom Layer w10: v1(2109,3394.38) 2109.62,3395 2777.98,3395 3070,3687.02 v1(3070,3733.27)
CAN-TX: U1.1 U6.62 | length 1775.4
  Top Layer w10: U1.1 2125,3365 2134,3374 2134,3408.29 2125,3417.29 v1(2125,3420) ; v1(3014.82,3720.18) 3014.82,3722.37 3050.72,3758.27 U6.62
  Bottom Layer w10: v1(2125,3420) 2780.36,3420 3014.82,3654.47 v1(3014.82,3720.18)
EE_SCL: R16.1 U4.6 U6.29 | length 821.1
  Top Layer w10: U4.6 2633.23,3295 ; U6.29 2838.58,3561.42 2860,3540 2860,3521.77 2639.11,3300.89 ; R16.1 2849.03,3119.84 2763.87,3205 2723.23,3205 2639.11,3289.11 ; 2633.23,3295 2639.11,3289.11 ; 2633.23,3295 2639.11,3300.89 ; 2639.11,3289.11 2639.11,3300.89
EE_SDA: R17.1 U4.5 U6.30 | length 822.4
  Top Layer w10: R17.1 2763.83,3119.84 2638.67,3245 U4.5 2516.93,3245 2490.12,3271.81 2490.12,3406.11 2519.01,3435 2585,3435 2691.73,3541.73 U6.30
FLASH_CS: U3.1 U6.15 | length 737.4
  Top Layer w10: U3.1 2419.29,3685 2684.29,3950 2830,3950 2872.07,3907.93 ; U6.15 2872.05,3907.91
FLASH_MISO: R11.1 U3.2 U6.22 | length 1631.7
  Top Layer w10: v1(2210,3635) U3.2 2410,3635 2610,3835 2803.23,3835 2847.93,3790.3 2847.93,3726.24 2820.9,3699.21 U6.22 ; v1(2380,4075) 2410,4075 2421.42,4063.58 R11.1
  Bottom Layer w10: v1(2210,3635) 2185,3660 2185,3670 2180,3675 2180,4050 2235,4105 2350,4105 v1(2380,4075)
FLASH_MOSI: R12.1 U3.5 U6.23 | length 894.3
  Top Layer w10: v1(2505,4070) 2505,4023.28 R12.1 ; U3.5 2614.15,3535 v1@2650.36,3571.21 ; v1(2645,3576.57) v1@2650.36,3571.21 ; U6.23 2730.46,3679.53 2665,3614.07 2665,3585 2664.15,3585 v1@2650.36,3571.21
  Bottom Layer w10: v1(2505,4070) 2665,3910 2665,3835.36 2645,3815.36 v1(2645,3576.57)
FLASH_SCK: R10.1 U3.6 U6.21 | length 996.7
  Top Layer w10: v1(2335,4070) 2335,4022.87 R10.1 ; v1(2470,3585) 2613.31,3585 2660,3631.69 2660,3655 2723.9,3718.9 U6.21
  Bottom Layer w10: v1(2335,4070) 2335,3675 2425,3585 v1(2470,3585)
GND: C1.2 C2.1 C3.2 C4.1 C5.2 C6.2 C7.2 C8.1 C9.1 C10.1 C11.2 C12.2 C13.1 C14.1 C15.2 C16.2 C17.1 C18.1 C19.1 D2.2 D3.2 J1.3 LIN.5 P1.2 P2.1 P3.4 P4.2 P5.5 P5.6 P10.2 P10.4 P10.6 P10.8 P10.10 Q2.3 R7.2 R13.2 R15.1 R20.2 R24.2 S1.2 S2.2 S3.2 U1.2 U1.8 U2.1 U2.9 U3.4 U4.1 U4.2 U4.3 U4.4 U4.7 U5.2 U6.12 U6.18 U6.31 U6.47 U6.63 U7.1 USB-TypeC1.A1 USB-TypeC1.A12 | length 24792.9
  Top Layer w10: 1060,3175 1060,3175.95 1079.05,3195 ; 1060,3195 1079.05,3195 ; 1060,3215 1079.05,3195.95 1079.05,3195 ; D3.2@1288.9,4485 1360.32,4413.58 1360.32,4332.13 1316.3,4288.11 USB-TypeC1.A1 ; USB-TypeC1.A12@1310,4050 1325,4050 1325.31,4050.31 1344.69,4050.31 1428.14,3966.86 1428.14,3941.74 C2.1 1429.88,3938.03 1452.72,3915.2 LIN.5 ; U1.8 1453.15,3365 1395.07,3306.93 J1.3 1310.91,3295.95 1209.95,3195 1079.05,3195 ; v1(2710,3510) 2712.71,3510 2724.75,3522.05 U6.31 ; v1(2710,3795) 2711.26,3795 2728.31,3777.95 U6.18 ; 2785,4185 v1(2785,4030) 2865.71,4030 2931.1,3964.61 U6.12 ; U6.47 3127.95,3477.95 3135.86,3485.86 3152.37,3485.86 3185.47,3452.76 3185.47,3310.86 3191.33,3305 3275.36,3305 3292.09,3321.73 3292.09,3364.65 3367.44,3440 S3.2 ; U6.63 3219.72,3776.73 3307.91,3776.73 3329.73,3754.92 3388.08,3754.92 3419.06,3723.94 R24.2
  Top Layer w20: v2(1475,3200) 1525,3250 C4.1 ; U1.2 1654,3415 1622.03,3446.97 1622.03,3528.24 1640.76,3546.97 1737.62,3546.97 1759.59,3525 v3(1765,3525) ; Q2.3 1841.99,3767.4 1854.59,3780 v3(1860,3780) ; R7.2 2095,3661.06 2221.06,3535 U3.4 2311.99,3535 2314.57,3532.42 2314.57,3492.2 2357.48,3449.29 U4.1 U4.2 U4.3 ; v3(2280,3295) U4.3 ; C8.1 2348.19,4924.25 2348.19,4901.72 2369.47,4880.43 2411.08,4880.43 2432.36,4859.15 2432.36,4811.81 2400.55,4780 U5.2@2376.93,4780 ; U4.4 U4.3 ; U4.7 2614.59,3345 2624.59,3355 v3(2630,3355) ; R20.2 2595.83,3118.7 2638.78,3118.7 ; 2615,2755 2615,2756.22 2638.78,2780 ; 2635,2755 2638.78,2758.78 2638.78,2780 ; 2665,2755 2640,2780 2638.78,2780 ; C10.1 2681.73,3118.7 2638.78,3118.7 ; v3(2810,3355) 2810,3349.59 2819.14,3340.45 2819.14,3333.43 2954.03,3198.54 3580,3198.54 ; S3.2 S3.2@3422.56,3440 ; R24.2 3464.19,3720 ; C19.1 3562.56,3920 C18.1 3556.81,3819.25 3556.81,3812.62 3464.19,3720 ; S2.2 S3.2@3422.56,3440 ; 3605,3198.54 3580,3198.54 ; 3606.18,3175 3603.54,3175 3580,3198.54 ; 3606.18,3225 3580,3198.82 3580,3198.54 ; 2638.78,2780 2638.78,3118.7 ; S3.2@3422.56,3440 3436.18,3453.62 3436.18,3534.38 3466.18,3564.38 3466.18,3718.01 3464.19,3720
  Top Layer w30: 1060,3175 1060,2815 1360,2515 P2.1 ; 1060,3175.95 1060,3195 1060,3215 1060,3771.73 1205.83,3917.56 1304.17,3917.56 1376.73,3845 LIN.5 ; P1.2 1085,4485 D3.2@1288.9,4485 ; v3(1450,2735) R15.1 ; C14.1 1577.91,4443.03 1592.28,4428.66 1592.28,4416.93 1632.72,4376.5 2068.5,4376.5 v2(2140,4305) ; U2.9 1595,3037.48 1650.28,2982.2 U2.1@1703.03,2982.2 ; P5.5 P5.6 ; U2.1 1722.48,2980 1724.68,2977.8 1724.68,2960.55 1744.76,2940.48 1744.76,2862.73 R13.2 1752.49,2867.27 1760.23,2875 2050,2875 ; C1.2 1922.56,3506.97 1970,3554.41 v3(1970,3555) ; v2(2040,4935) C9.1 ; C12.2 2083.7,4520 2100.2,4536.5 2100.2,4615.2 2135,4650 v2(2135,4735) ; C6.2 2046.3,4758.7 2060.01,4744.99 2070,4735 v2(2135,4735) ; v3(2060,3555) 2061.91,3553.09 2061.91,3531.99 2128.88,3465.02 2129.48,3465.02 2160,3434.5 v3(2160,3245) 2160,3076.3 C3.2 2123.9,3075 2107.4,3058.5 2107.4,2966.3 2075,2933.9 2075,2900 ; P3.4 2075,2725 ; v2(2275,4300) 2276.91,4298.09 2276.91,4278.09 P4.2 ; U5.2@2278.5,4780 2180,4780 v2(2135,4735) ; C5.2 2591.83,4063.17 ; C16.2 2785,4185 2725,4185 2603.17,4063.17 2591.83,4063.17 ; v2(2940,4915) 2938.7,4915 2843.7,4820 C7.2 2806.3,4723.7 2901.61,4628.39 S1.2 ; v2(3120,4115) 3120.06,4115.06 3120.06,4184.94 C15.2@3120,4185 ; v2(3205,4110) 3206.1,4110 3228.45,4132.35 3404.42,4132.35 3441.51,4169.44 3509.44,4169.44 P10.2 ; v2(3510,3920) 3562.56,3920 ; P10.10 3365,4425 3111.97,4425 3056.97,4480 C17.1 C13.1 2974.25,4480.75 2954.45,4480.75 2925.2,4510 C11.2 2773.9,4510 2698.35,4434.45 U7.1 2440,4245 P4.2 ; S2.2@3575,3435 S2.2 3597.56,3440 3606.18,3431.38 3606.18,3225 3606.18,3199.72 ; 3605,3198.54 3606.18,3199.72 ; 2050,2875 2075,2850 ; 2050,2875 2075,2875 ; 2050,2875 2075,2900 ; 2075,2725 2075,2755 ; 2075,2725 2080,2725 2110,2755 ; 2075,2755 2110,2755 ; 2075,2755 2075,2790 ; 2075,2790 2075,2850 ; 2075,2790 2110,2755 ; 2075,2850 2075,2875 ; 2075,2875 2075,2900 ; 2110,2755 2615,2755 2635,2755 2665,2755 3459.76,2755 3606.18,2901.42 3606.18,3175 3606.18,3199.72 ; P4.2 2440,4115 2540,4115 2591.83,4063.17
  Bottom Layer w10: v1(2710,3510) v1(2710,3795) 2785,3870 v1(2785,4030)
  Bottom Layer w20: D3.2 D2.2 ; J1.3 1417.83,3200 v2(1475,3200) ; v3(1765,3525) 2045,3245 v3(2160,3245) 2230,3245 v3(2280,3295) ; v3(1860,3780) 1860,3970.21 1725,4105.21 1725,4290 1740,4305 v2(2140,4305) ; v3(2630,3355) v3(2810,3355)
  Bottom Layer w30: D2.2 1290,4680.4 1340,4730.4 1340,4930 1394.53,4984.53 1605.47,4984.53 P5.6 ; v3(1450,2735) 1450,2732.29 1480,2702.29 P2.1 1494.53,2500.47 1494.53,2458.05 1537.57,2415 1975,2415 P3.4 ; P5.5 1755,4735 v2(2135,4735) ; v3(1970,3555) v3(2060,3555) ; v2(2040,4935) 2135,4840 v2(2135,4735) ; v2(2275,4300) 2272.29,4300 2267.29,4305 v2(2140,4305) 2140,4727.29 2135,4732.29 v2(2135,4735) ; v2(2940,4915) 2935,4915 2755,4735 v2(2135,4735) ; v2(3120,4115) 3197.29,4115 3202.29,4110 v2(3205,4110) ; v2(3510,3920) 3510,3922.71 3515,3927.71 P10.2 P10.4 P10.6 P10.8 P10.10
KEY-CONFIRM: P10.9 R30.2 U6.24 | length 2174.9
  Top Layer w10: U6.24 2838.09,3659.84 2858.6,3680.36 v1(2860,3680.36) ; v1(2855,4305) 2949,4399 3375.77,4399 3496.3,4519.53 3522.5,4519.53 3570.47,4567.5 3607.5,4567.5 P10.9 3530.75,4659.25 3460.75,4659.25 3208.01,4911.99 3198.13,4911.99 3189.35,4920.77 R30.2
  Bottom Layer w10: v1(2855,4305) 2855,4013.82 2880,3988.82 2880,3700.36 v1(2860,3680.36)
KEY-DOWN: P10.3 R27.2 S3.1 U6.9 | length 2660.2
  Top Layer w10: U6.9 2990.16,3920.03 3001.21,3931.08 v1(3001.21,3933.79) ; v1(3065,4300) v1(3300,4300) 3301.5,4301.5 3398.5,4301.5 3469.53,4230.47 3533.44,4230.47 3570.47,4267.5 3607.5,4267.5 P10.3 ; R27.2 3189.65,4700 v1(3300,4700) ; S3.1 3400,3608.23 v1(3400,3530)
  Bottom Layer w10: v1(3001.21,3933.79) 3065,3997.57 v1(3065,4300) ; v1(3300,4300) v1(3300,4700) ; v1(3400,3530) 3625,3530 3660,3565 3660,4230 P10.3
KEY-LEF: P10.5 R28.2 U6.10 | length 1651.3
  Top Layer w10: U6.10 2970.47,3942.77 2980,3952.29 v1(2980,3955) ; v1(3030,4325) 3030.75,4325.75 3329.25,4325.75 v1(3330,4326.5) ; R28.2 3287.31,4774.7 v1(3316.01,4746.01) ; v1@3330,4325 3565,4325 P10.5
  Bottom Layer w10: v1(2980,3955) 3030,4005 v1(3030,4325) ; v1(3316.01,4746.01) 3316.01,4743.3 3330,4729.31 v1(3330,4326.5)
KEY-RIGHT: P10.7 R29.2 U6.11 | length 1924.9
  Top Layer w10: v1(2950,3985) 2950.79,3984.21 U6.11 ; v1(2980,4320) 2980,4355 3000,4375 3374.4,4375 3418.92,4419.53 3522.5,4419.53 3570.47,4467.5 3607.5,4467.5 P10.7 ; R29.2 3247.67,4849.7 3355,4742.37 v1(3355,4695)
  Bottom Layer w10: v1(2950,3985) 2980,4015 v1(2980,4320) ; v1(3355,4695) 3385,4665 3587.97,4665 3659.53,4593.44 3659.53,4519.53 P10.7
KEY-UP: P10.1 R26.2 S2.1 U6.8 | length 2144.3
  Top Layer w10: 2960.86,3780 2950.86,3770 v1(2950,3770) 3009.84,3829.84 U6.8 ; R26.2 3189.35,4620.77 3243.2,4566.91 3248.09,4566.91 v1(3250,4565) ; v1(3245,4095) 3550.87,4095 3555,4095 ; S2.1 3563.62,3613.23 3545,3631.85 3545,3680 3593.31,3728.31 3593.31,4056.69 3555,4095 ; P10.1 3596.33,4156.33 3596.33,4136.33 3555,4095
  Bottom Layer w10: v1(2950,3770) 3012.41,3832.41 3077.41,3832.41 3137.64,3892.64 3137.64,4012.13 3200.5,4075 3222.57,4075 3242.57,4095 v1(3245,4095) 3245,4326.54 3250,4331.54 v1(3250,4565)
LED1: D4.2 U6.39 | length 770.8
  Top Layer w10: U6.39 2970.47,3264.53 3005,3230 v1(3475,3230)
  Bottom Layer w10: D4.2 v1(3475,3230)
LED2: D5.2 U6.40 | length 1082.5
  Top Layer w10: U6.40 2990.16,3269.84 3000,3260 v1(3540,3260)
  Bottom Layer w10: D5.2 3540,2985 v1(3540,3260)
LIN: C2.2 J1.7 LIN.6 R1.1 | length 1460.7
  Top Layer w10: J1.7 1150.83,3300.67 1150.83,3520.83 1422.39,3792.39 1450.11,3792.39 LIN.6 1469.45,3795 1495,3820.55 1495,3832.63 1496.26,3833.89 1496.26,3856.11 1495,3857.37 1495,3931.97 1485,3941.97 1543.03,4000 1923.23,4000 1983.7,3939.53 R1.1
LIN-RES: R5.2 U6.50 | length 1569.2
  Top Layer w10: R5.2 2440,3735 2710,4005 2852.57,4005 2882.57,3975 2885.36,3975 v1(2905.18,3955.18) ; v1(2950,3690) 3115,3525 3117.95,3522.05 U6.50
  Bottom Layer w10: v1(2905.18,3955.18) 2905,3955 2905,3848.65 2900,3843.65 2900,3740 v1(2950,3690)
LIN-RXD: LIN.1 U6.43 | length 1713.9
  Top Layer w10: LIN.1 1684.02,3695 1756.02,3623 2097.36,3623 2250,3470.36 v1(2250,3330) ; v1(3043.9,3355) 3043.9,3357.71 3049.21,3363.02 U6.43
  Bottom Layer w10: v1(2250,3330) 2444.56,3330 2454.56,3320 3020,3320 3041.98,3341.98 3041.98,3353.09 v1(3043.9,3355)
LIN-SLP: LIN.2 U6.55 | length 1889.5
  Top Layer w10: LIN.2 1650.55,3745 1623.74,3718.19 1623.74,3683.89 1675.63,3632 v1(1710,3632) ; v1(2915,3590) 2959.64,3590 v1(2994.82,3554.82) ; v1(3065,3620) 3065.47,3620.47 U6.55
  Bottom Layer w10: v1(1710,3632) 1897,3445 2327.5,3445 2333.5,3439 2764,3439 v1(2915,3590) ; v1(2994.82,3554.82) 3060,3620 v1(3065,3620)
LIN-TXD: LIN.4 U6.42 | length 1963.8
  Top Layer w10: LIN.4 1737.65,3845 1767.65,3815 v1(1905,3815) ; v1(2875,3630) 2955,3630 3030,3555 3029.53,3554.53 U6.42
  Bottom Layer w10: v1(1905,3815) 1905,3540 1970,3475 2325,3475 2345,3455 2700,3455 v1(2875,3630) 2875,3660 2890,3675
MOTOR-DRIVE1: U2.3 U6.37 | length 1475.3
  Top Layer w10: U2.3 1726.89,3080 1805,3158.11 v1(1805,3190) ; v1(2926.21,3281.21) 2926.21,3306.32 2931.1,3311.21 U6.37
  Bottom Layer w10: v1(1805,3190) 2835,3190 v1(2926.21,3281.21)
MOTOR-DRIVE2: U2.2 U6.38 | length 1533.8
  Top Layer w10: U2.2 1726.89,3030 1828.09,3131.2 1828.09,3153.09 v1(1830,3155) ; v1(2950,3245) 2951.21,3246.21 2951.21,3325.16 2950.79,3325.59 U6.38
  Bottom Layer w10: v1(1830,3155) 2860,3155 v1(2950,3245)
MOTOR-OUT1: P2.4 U2.6 | length 916.4
  Top Layer w30: U2.6@1465.32,3077.8 1412.8,3077.8 1385,3050 1385,2695 1505,2575 1720,2575 P2.4
MOTOR-OUT2: P2.5 U2.8 | length 653
  Top Layer w30: U2.8 1505,2980 1541.85,2943.15 1563.09,2943.15 1695,2811.24 1695,2760 1745,2710 1745,2650 P2.5
NetC1_1: C1.1 U1.5 | length 451.1
  Top Layer w10: U1.5 1516,3515 1592,3591 1781.44,3591 1854.72,3517.72 1856.69,3517.72 1867.44,3506.97 C1.1
NetC17_2: C17.2 R25.1 S1.1 U6.7 | length 1869.3
  Top Layer w10: S1.1 S1.1@3027.56,4801.61 ; U6.7 3029.53,3795.47 v1(3029.74,3795.26) ; C17.2 3056.97,4537.09 3085,4537.09 ; v2(3060,4875) 3060,4866.88 3046.18,4853.06 3046.18,4820.24 S1.1@3027.56,4801.61 ; 3105,4537.09 3101.97,4537.09 ; R25.1 3101.97,4537.09 ; v2(3185,4165) 3185,4156.88 3170,4141.88 3170,4085 v2(3215,4040) ; S1.1@3027.56,4801.61 3046.18,4782.99 3046.18,4683.69 3093.48,4636.39 3093.48,4545.57 ; 3085,4537.09 3093.48,4537.09 ; 3085,4537.09 3093.48,4545.57 ; 3093.48,4537.09 3101.97,4537.09 ; 3093.48,4537.09 3093.48,4545.57 ; 3093.48,4545.57 3101.97,4537.09
  Bottom Layer w10: v1(3029.74,3795.26) 3070.26,3795.26 ; v2(3060,4875) 3215,4720 3215,4191.57 3188.43,4165 v2(3185,4165) ; 3072.5,3797.5 3070.26,3795.26 ; v2(3215,4040) 3215,3940 3070.26,3795.26
NetD1_1: D1.1 USB-TypeC1.A4 | length 250
  Top Layer w10: USB-TypeC1.A4 1375.94,4229.06 D1.1
NetD2_1: D2.1 R18.2 | length 572.9
  Top Layer w10: v1(1575,4665) 1575.47,4664.53 1575.47,4620.47 R18.2
  Bottom Layer w10: D2.1 1390,4840.27 1424.26,4874.53 1495.74,4874.53 1515.47,4854.8 1515.47,4724.53 v1(1575,4665)
NetD3_1: D3.1 R19.2 | length 208.8
  Top Layer w10: D3.1@1388.9,4480 1465,4480 1517.5,4532.5 R19.2
NetD4_1: D4.1 R22.2 | length 451.4
  Top Layer w10: R22.2 2942.11,3119.84 2972.26,3150 3370,3150 D4.1
NetD5_1: D5.1 R23.2 | length 433.8
  Top Layer w10: R23.2 3025,3120 3100,3120 3300,2920 D5.1
NetD6_2: D6.2 U6.1 | length 1493.1
  Top Layer w10: v1(2640,3860) 2800.85,3860 2940.85,3720 v1(2970,3720) ; v1(3135,3800) 3135,3802.71 3147.64,3815.34 U6.1
  Top Layer w20: D6.2 2125.14,4085 2295.14,3915 v2(2500,3915)
  Bottom Layer w10: v2@2510,3915 2565,3860 v1(2640,3860) ; v1(2970,3720) 3010,3760 3095,3760 v1(3135,3800)
  Bottom Layer w20: v2(2500,3915) v2@2510,3915
NetQ1_1: Q1.1 R1.2 | length 303.9
  Top Layer w10: Q1.1 1870.12,3905 1935.12,3840 2049.53,3840 2090,3880.47 R1.2
NetQ1_2: Q1.2 R2.1 R4.2 | length 1094.2
  Top Layer w10: v1(1560,3940) R2.1 1610,3936.06 1656.06,3890 1737.48,3890 1759.88,3867.6 Q1.2 ; v1(1560,4025) 1560.28,4024.72 2069.32,4024.72 2126.65,3967.39 2126.65,3841.06 2094.53,3808.94 R4.2
  Bottom Layer w10: v1(1560,3940) v1(1560,4025)
NetQ2_1: Q2.1 R4.1 | length 202.2
  Top Layer w10: Q2.1 1875.12,3730 1950.12,3805 R4.1
NetQ2_2: Q2.2 R5.1 R7.1 | length 346
  Top Layer w10: Q2.2 1937.4,3692.6 1970,3660 2030.94,3660 R7.1 2035.71,3665.24 2035.71,3734.76 R5.1
NetR6_1: R6.1 R8.1 USB-TypeC1.A6 | length 476.9
  Top Layer w10: USB-TypeC1.A6 1359.68,4189.69 v1(1360,4190) ; v1(1545,4190) 1623.78,4268.78 R6.1 R8.1
  Bottom Layer w10: v1(1360,4190) v1(1545,4190)
NetR9_1: R9.1 USB-TypeC1.A7 | length 401.6
  Top Layer w10: USB-TypeC1.A7 1354.68,4150.31 v1(1355,4150) ; v1(1595,4150) 1648.78,4203.78 R9.1
  Bottom Layer w10: v1(1355,4150) v1(1595,4150)
NetR13_1: R13.1 U2.7 | length 372.7
  Top Layer w10: U2.7@1463.11,3030 U2.7 ; R13.1@1512.27,2913.15 1530,2895.42 R13.1
  Top Layer w20: U2.7 1481.97,3027.2 1447.2,3027.2 1430.32,3010.32 1430.32,2909.68 1475,2865 1520,2865 R13.1
NetR14_2: R14.2 R15.2 U2.4 | length 701.8
  Top Layer w10: R14.2 R15.2 1580.9,2733.63 v1(1671.88,2733.63) ; U2.4 1726.89,3130 1753.09,3156.2 1753.09,3163.09 v1(1755,3165)
  Bottom Layer w10: v1(1671.88,2733.63) 1673.43,2735.18 1690.18,2735.18 1755,2800 v1(1755,3165)
NetR24_1: R24.1 U6.60 | length 142
  Top Layer w10: U6.60 3358.9,3718.9 R24.1
OLED-SCL: P4.3 U6.58 | length 1785.9
  Top Layer w10: P4.3 2482.5,4187.5 2519.53,4187.5 2597.03,4265 3385,4265 v1(3425,4225) ; U6.58 3304.53,3679.53 3305,3680 3330.06,3654.94 3417.23,3654.94 3422.29,3660 v1(3425,3660)
  Bottom Layer w10: v1(3425,3660) v1(3425,4225)
OLED-SDA: P4.4 U6.59 | length 1545.9
  Top Layer w10: P4.4 2635,4240 3345,4240 v1(3385,4200) ; U6.59 3257.91,3699.21 3318,3699.21 3337.27,3679.94 3384.94,3679.94 v1(3385,3680)
  Bottom Layer w10: v1(3385,3680) v1(3385,4200)
PA0: U6.14
PA2: U6.16
PA3: U6.17
PA4: U6.20
PA8: P2.2 U6.41 | length 2492.2
  Top Layer w10: P2.2 1587.5,2507.5 1624.53,2507.5 1722.03,2410 v1(3015,2410) ; U6.41 3009.84,3359.8 3015.16,3354.49 v1(3015.16,3285)
  Bottom Layer w10: v1(3015,2410) 3015,3275
PA11: R9.2 U6.44 | length 2802.3
  Top Layer w10: R9.2 1747.87,4205 v1(1795,4205) ; v1(2133.36,3510.04) 2193.4,3450 2195,3450 2209,3436 2209,3265.64 v1(2447.32,3027.32) ; v1(2970,2950) 3062.29,2950 3067.29,2955 v1(3070,2955) ; v1(3050,3295) 3051.91,3296.91 3051.91,3318.5 3068.9,3335.48 U6.44
  Bottom Layer w10: v1(1795,4205) 2060,4205 2099,4166 2099,3544.4 v1(2133.36,3510.04) ; v1(2447.32,3027.32) 2524.64,2950 v1(2970,2950) ; v1(3050,3295) 3050,3054.64 3070,3034.64 v1(3070,2955)
PA12: R8.2 U6.45 | length 2777.2
  Top Layer w10: R8.2 1996.22,4333.78 v1(2115,4215) ; v1(2150,3535) 2225,3460 2225,3285 2510,3000 2512.29,3000 2517.29,2995 v1(2520,2995) ; v1(2895,2995) 3025,2995 v1(3085,3055) ; U6.45 3088.58,3311.42 v1(3090,3310)
  Bottom Layer w10: v1(2115,4215) 2115,3570 v1(2150,3535) ; v1(2520,2995) v1(2895,2995) ; v1(3085,3055) 3085,3057.71 3090,3062.71 v1(3090,3310)
PA13: P3.2 U6.46 | length 1706.4
  Top Layer w10: P3.2 2380,2620 v1(3120,2620) ; U6.46 3108.27,3373.2 3118.9,3362.57 3118.9,3290.93 v1(3117.07,3289.1)
  Bottom Layer w10: v1(3117.07,3289.1) 3118.53,3287.63 3118.53,2621.47 v1(3120,2620)
PA14: P3.3 U6.49 | length 2117.8
  Top Layer w10: P3.3 2182.5,2507.5 2219.53,2507.5 2267.03,2460 v1(3225,2460) ; U6.49 3219.34,3501.53 3219.34,3358.37 3225,3352.71 v1(3225,3350)
  Bottom Layer w10: v1(3225,2460) v1(3225,3350)
PB0: U6.26
PB1: U6.27
PB2: R20.1 U6.28 | length 848.1
  Top Layer w10: R20.1 2519.53,3060.47 2449.14,3130.86 2449.14,3394.14 2540.55,3485.55 2603.17,3485.55 2698.72,3581.1 U6.28
PB4: U6.56
PB5: U6.57
PB12: U6.33
PB13: U6.34
PB14: U6.35
PB15: U6.36
PC5: U6.25
PC10: U6.51
PC11: U6.52
PC12: U6.53
PC13: U6.2
PC14: C18.2 U6.3 Y2.1 | length 520.9
  Top Layer w10: U6.3 3108.27,3923.27 3140,3955 3195,3955 3321.61,3828.39 Y2.1 3504.05,3828.39 C18.2
PC15: C19.2 U6.4 Y2.2 | length 513.5
  Top Layer w10: U6.4 3088.58,3933.58 3156.61,4001.61 Y2.2 3504.06,4001.61 C19.2
PD0: C15.1 R21.2 U6.5 Y1.2 | length 398.4
  Top Layer w10: R21.2 C15.1 3065,4120.5 3097.87,4087.63 3097.87,4057.13 Y1.2 3068.9,4013.9 U6.5
PD1: C16.1 R21.1 U6.6 Y1.1 | length 447.7
  Top Layer w10: R21.1 C16.1 2905,4182.68 Y1.1 2915.08,4050 2936.35,4028.73 2956.27,4028.73 3049.21,3935.79 U6.6
PD2: U6.54
VCC: C3.1 C4.2 C6.1 C9.2 LIN.3 LIN.7 P1.1 Q1.3 R2.2 U2.5 U5.3 | length 4777.4
  Top Layer w20: P1.1 1420,4590 1535,4705 1671.3,4705 1796.3,4830 C6.1 1871.1,4830 1927.7,4886.59 2185.1,4886.59 ; LIN.7@1435.98,3745 LIN.7 1525,3745 1525,3750 v4(1570,3795) ; LIN.3 v4(1570,3795) ; Q1.3 1759.88,3942.4 1757.48,3940 R2.2 1669.06,3943.94 1665.28,3947.72 1661.34,3947.72 1643.78,3965.28 1643.78,3966 1632.06,3977.72 1555.29,3977.72 1530,3952.43 1530,3835 v4(1570,3795) ; C9.2@2196.81,4939.25 2196.81,4898.31 ; 2220,4886.59 2208.53,4886.59 ; U5.3 2369.05,4839.06 2321.52,4886.59 2208.53,4886.59 ; 2185.1,4886.59 2208.53,4886.59 ; 2185.1,4886.59 2196.81,4898.31 ; 2196.81,4898.31 2208.53,4886.59
  Top Layer w30: U2.5 1502.01,3130 1551.2,3179.19 1574.19,3179.19 1624.37,3229.37 1624.37,3249.25 C4.2 1625.12,3334.59 1570,3389.71 v4(1570,3465) ; C4.2@1625.12,3248.03 1850.67,3248.03 1948.7,3150 C3.1